# Altium PCB Mach_side_pcb.PcbDoc
Units mil, origin at the board's own origin, x right, y up, seen from the top; angles counter-clockwise.
Board outline 1370 x 1685 mil, 2 copper layers (Top Layer, Bottom Layer); 4 components, 8 nets, 24 pads, 4 vias.
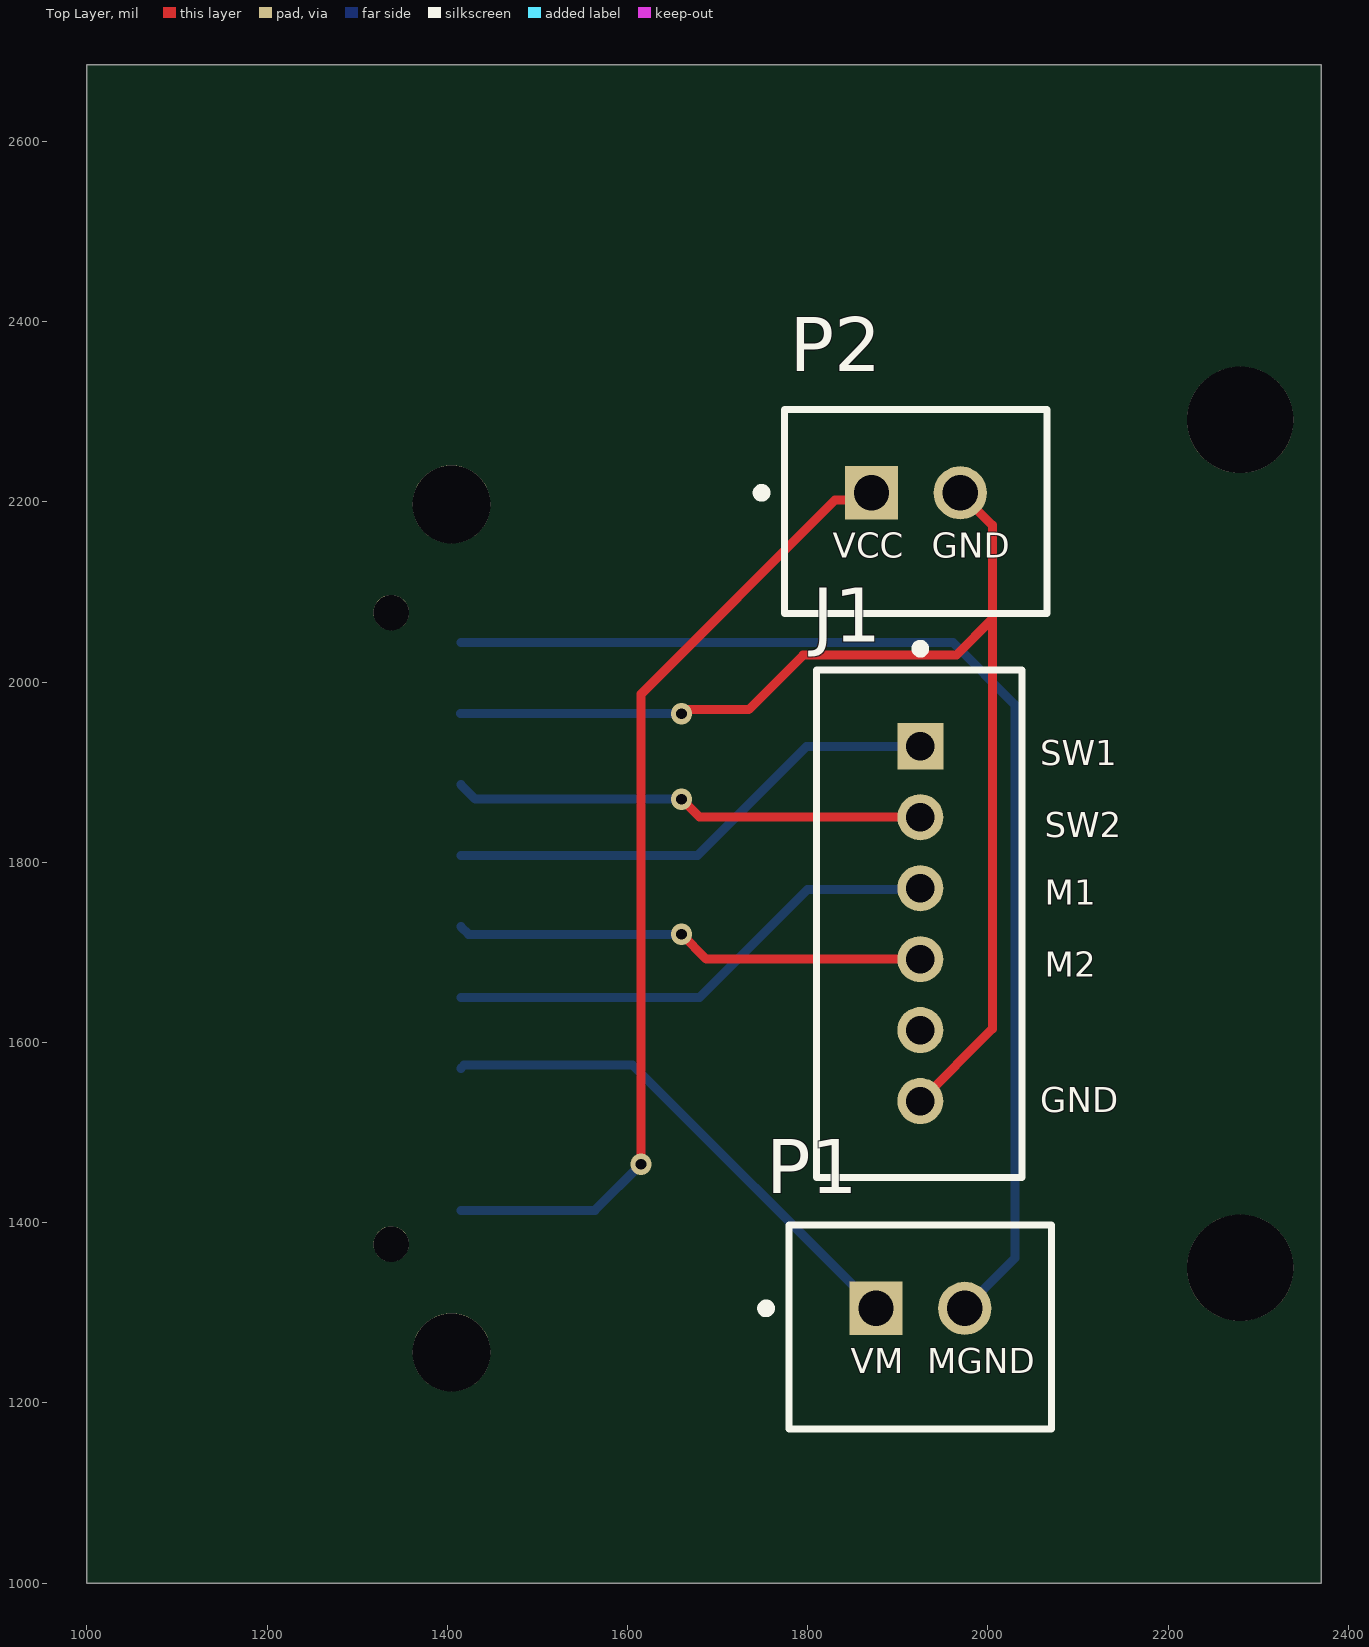
[diagram p0: Top Layer view]
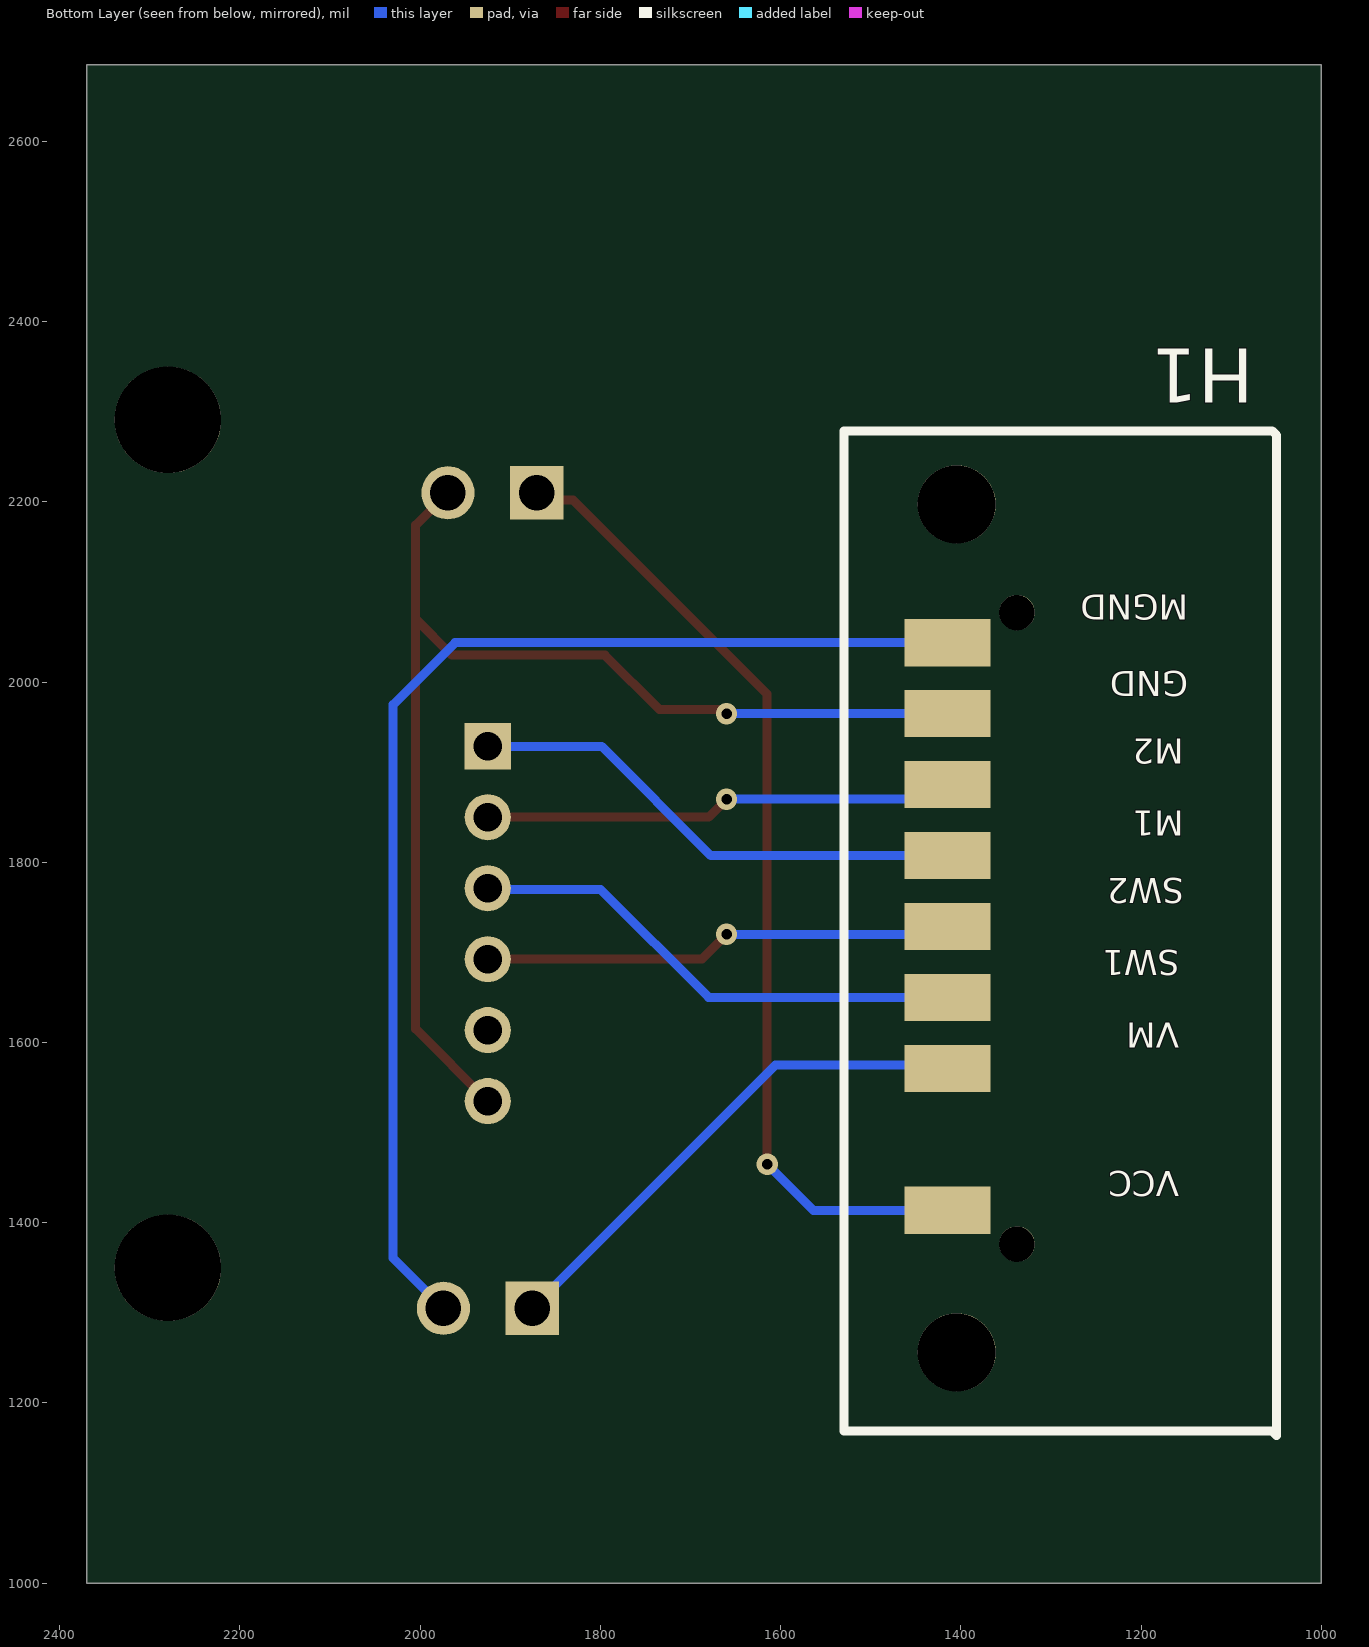
[diagram p1: Bottom Layer view, seen from below]
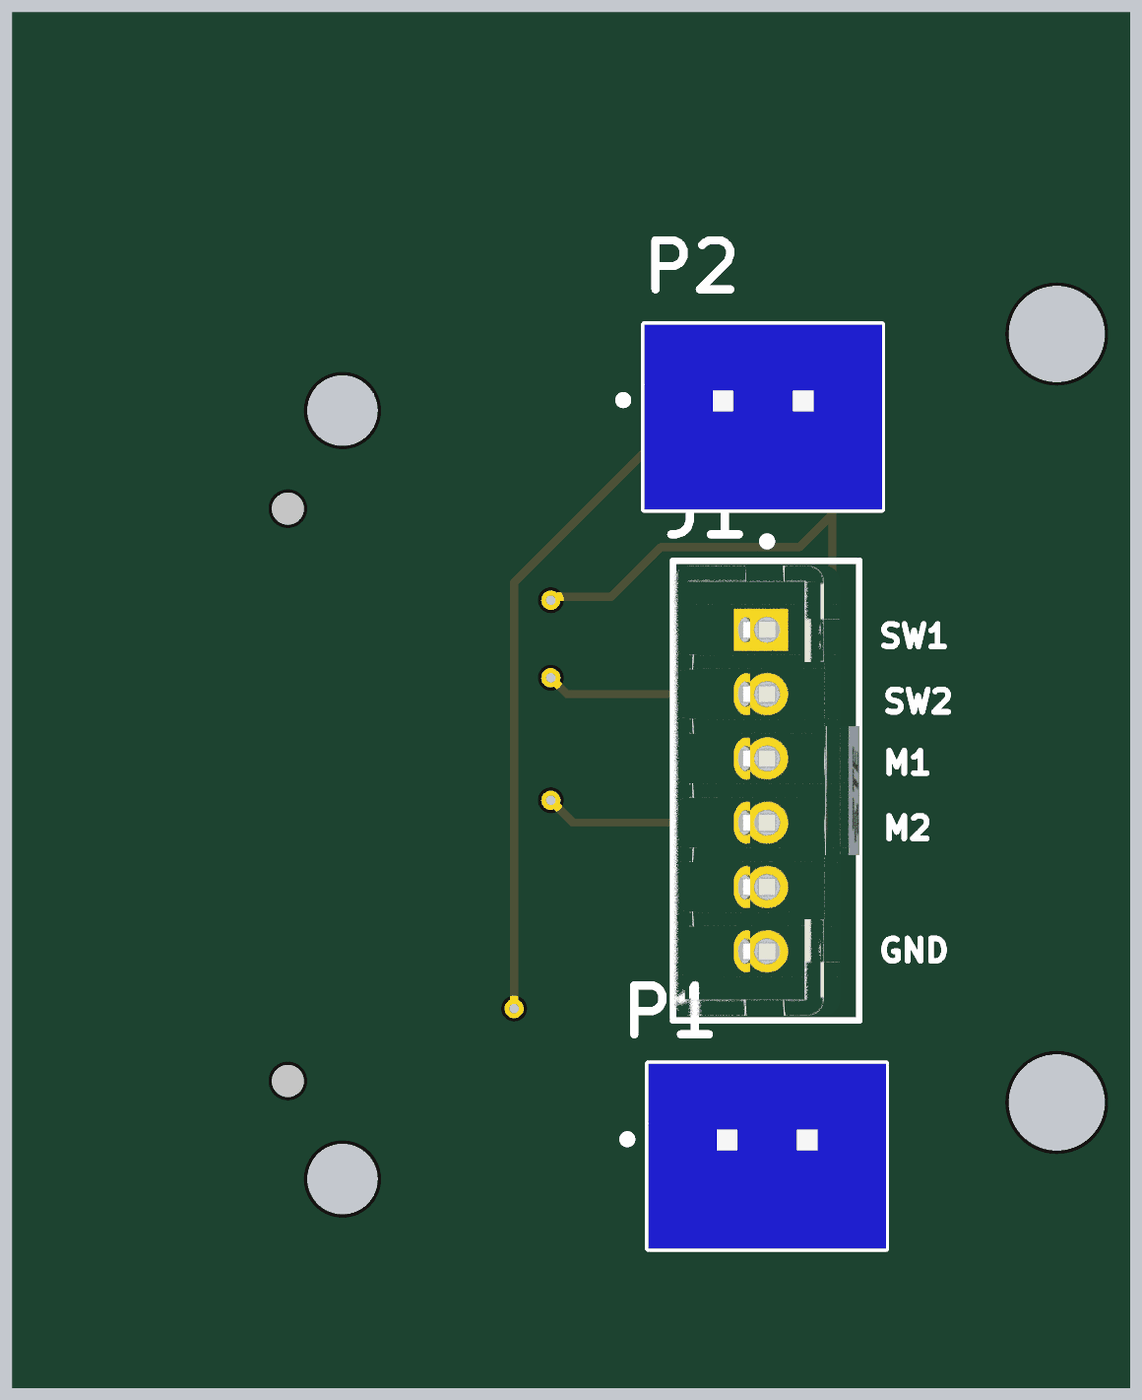
[diagram p2: 3D render of the assembled board from above, using the file's embedded part models]

## Layer stack, top to bottom
Top Solder: solder mask 0.4, Solder Resist, Dk 3.5
Top Layer: signal copper 1.4
Dielectric 1: dielectric 12.6, FR-4, Dk 4.8
Bottom Layer: signal copper 1.4
Bottom Solder: solder mask 0.4, Solder Resist, Dk 3.5

## Board outline
1000,1000 2370,1000 2370,2685 1000,2685

## Design rules (kind name [scope] priority, off if disabled: settings)
Clearance [All] p1: gap=10 ignorepadtopadclearanceinfootprint=FALSE except(0: Arc-Hole Track-Hole SMDPad-Hole THPad-Hole Via-Hole Fill-Hole Poly-Hole Region-Hole Text-Hole)
PolygonConnect [All] p1: connectstyle=Relief reliefconductorwidth=10 reliefentries=4 polygonreliefangle="90 Angle" airgapwidth=10
RoutingVias [All] p1: holewidth=28 width=50 viastyle="Through Hole" minholewidth=28 minwidth=50 maxholewidth=28 maxwidth=50
SolderMaskExpansion [All] p1: expansion=4 istentingtop=FALSE
Width [All] p1 off: maxlimit=10 minlimit=10 preferedwidth=10
30 further rules are at their usual default settings.

## Classes and differential pairs
component class Mach_side_sch: H1 J1 P1

## Components (designator, comment, footprint, x,y, rotation, side; value= is the part's Value field where it differs from the comment)
H1 "1747785-1" 1747785-1 1337.76,1376.32 r90 bottom
J1 "1735446-6" FP-1735446-6-MFG 1923.82,1731.89 r90 top
P1 "B2B-XH-A(LF)(SN)" JST-B2B-XH-A_V 1925,1305 r0 top
P2 "B2B-XH-A(LF)(SN)" JST-B2B-XH-A_V 1920,2210 r0 top

## Footprints (in the part's own frame and the unit in brackets; to place one, negate y for a bottom-side part, rotate by r counter-clockwise, add the part's x,y. Pads: shape width x height; smd on the part's side, far side on the other; paste and mask are expansions set on the pad)
1747785-1 [mm]
  rect 1.33x2.43 smd: 1(0.951,1.962) 2(4.952,1.962) 3(6.952,1.962) 4(8.952,1.962) 5(10.952,1.962) 6(12.951,1.962) 7(14.951,1.962) 8(16.951,1.962)
  round 2.2 hole 2.2 unplated: ""(-3.05,1.7) ""(20.85,1.7)
  round 1 hole 1 unplated: ""(0,0) ""(17.8,0)
  Top Layer lines w0.254: 20.826,1.7 20.838,1.712
  silkscreen extent -5.4,-7.32 22.92,4.88, body extent -5.1,-7.05 23,5, height 4.71
FP-1735446-6-MFG [mm]
  rect 1.3x1.3 hole 0.8 paste-1000 mask+0: 1(5,-0.03)
  round 1.3 hole 0.8 paste-1000 mask+0: 2(3,-0.03) 3(1,-0.03) 4(-1,-0.03) 5(-3,-0.03) 6(-5,-0.03)
  silkscreen extent -7.15,-2.9 7.87,2.9, body extent -7.25,-3 7.25,3, height 0.25
JST-B2B-XH-A_V [mm] "Header, 2-Leads, Body 7.4x5.75mm, Pitch 2.5mm"
  rect 1.5x1.5 hole 1: 1(-1.25,0)
  round 1.5 hole 1: 2(1.25,0)
  silkscreen extent -4.47,-3.4 3.7,2.35, body extent -3.7,-3.4 3.7,2.35, height 7

## Part data
J1: library part CMP-03369-000087-1, "CONN HEADER VERT 6POS 2MM", Current Rating=3A, Manufacturer=TE, Temperature="-25°C to +85°C", Temperature Range High=+85°C, Temperature Range Low=-25°C, Voltage Rating=100V, Automotive=No, Category=Conn, ComponentLink2Description=Datasheet, ComponentLink2URL=https://www.te.com/usa-en/product-1735446-6.html, Conn Gender=Male, Conn Orientation=Vertical, Contact Material=Tin,Nickel, Device Class L1=Connectors, Device Class L2="Headers and Wire Housings", Device Class L3=unset, Digikey Description="CONN HEADER VERT 6POS 2MM", Height=6.37mm, Lead Free=Yes, Manufacturer Part Number=1735446-6, Mouser Description="Headers & Wire Housings 6 POS HDR VERT 2.0mm", Number Of Contacts=6, Number of Rows=1, Octopart=https://octopart.com/1735446-6-te+connectivity-42205942, Package=1735446-6, Pitch=2mm, RoHS=TRUE
P1 P2: library part CMP-2000-05888-1, "Male Header, Pitch 2.5 mm, 1 x 2 Position, Height 7 mm, Tail Length 3.4 mm, -25 to 85 degC, RoHS, Bulk", Manufacturer=JST, Package Description="Male Header, Pitch 2.5 mm, 1 x 2 Position, Height 7 mm, Tail Length 3.4 mm", Package Reference=B2B-XH-A, Datasheet URL=http://www.jst-mfg.com/product/pdf/eng/eXH.pdf, Datasheet Version=05/2016, Manufacturer URL=http://www.jst.com/home2.html, Mounting Technology=ThroughHole, No of Positions=2, Pitch=2.5mm, Style/Orientation=StraightHeader/Plug, Termination=Crimp, Type=ShroudedHeader

## Free pads (board coordinates)
  round 118.11 hole 118.11 unplated: ""(2280,1350) ""(2280,2290.94)

## Via types
v1: diameter 23.62, hole 11.81, Top Layer to Bottom Layer, 4 vias

## Nets (pads, with @x,y where several pads share a name; then routed paths per layer and width w, separated by ;. In a path a pad name is that pad's centre, name@x,y a point inside that pad or via, vN(x,y) a via of type N, cw(c..) or ccw(c..) an arc to the next point about the centre after c; other vN are vias at no path point)
"CONN M1": H1.5 J1.1 | length 560.2
  Bottom Layer w10: H1.5 1677.48,1807.48 1798.74,1928.74 J1.1
"CONN M2": H1.6 J1.2 | length 525
  Top Layer w10: v1(1660,1870) 1680,1850 J1.2
  Bottom Layer w10: H1.6 1431.22,1870 v1(1660,1870)
"CONN SW1": H1.3 J1.3 | length 560.2
  Bottom Layer w10: H1.3 1680,1650 1800,1770 1923.74,1770 J1.3
"CONN SW2": H1.4 J1.4 | length 525
  Top Layer w10: v1(1660,1720) 1687.48,1692.52 J1.4
  Bottom Layer w10: H1.4 1423.74,1720 v1(1660,1720)
GND: H1.7 J1.6 P2.2 | length 1356.5
  Top Layer w10: v1(1660,1965) 1664.33,1969.33 1734.33,1969.33 1795,2030 1965,2030 2005,2070 ; J1.6 2005,1615.04 2005,2070 ; P2.2 2005,2174.21 2005,2070
  Bottom Layer w10: H1.7 H1.7 v1(1660,1965) v1(1660,1965)
MGND: H1.8 P1.2 | length 1336.6
  Bottom Layer w10: H1.8 1961.3,2043.7 2030,1975 2030,1360.79 P1.2
VCC: H1.1 P2.1 | length 1091.1
  Top Layer w10: v1(1615,1465) 1615,1986.57 1830.55,2202.12 1862.91,2202.12 P2.1
  Bottom Layer w10: H1.1 1563.78,1413.78 v1(1615,1465)
VM: H1.2 P1.1 | length 574.2
  Bottom Layer w10: H1.2 1418.74,1575 1605.79,1575 P1.1
pads on no net: H1. J1.5

## Silkscreen, mask and mechanical layers (free items; w line width, h text height)
Top Overlay:
  text "VCC" at 1827.87,2137.87 h27.56
  text "GND" at 1937.87,2137.87 h27.56
  text "SW1" at 2057.87,1907.87 h27.56
  text "SW2" at 2062.87,1827.87 h27.56
  text "M1" at 2062.87,1752.87 h27.56
  text "M2" at 2062.87,1672.87 h27.56
  text "GND" at 2057.87,1522.87 h27.56
  text "VM" at 1847.87,1232.87 h27.56
  text "MGND" at 1932.87,1232.87 h27.56
Bottom Overlay:
  text "MGND" at 1147.87,2097.13 h27.56 r180
  text "GND" at 1147.87,2012.13 h27.56 r180
  text "M2" at 1152.87,1937.13 h27.56 r180
  text "M1" at 1152.87,1857.13 h27.56 r180
  text "SW2" at 1152.87,1782.13 h27.56 r180
  text "SW1" at 1157.87,1702.13 h27.56 r180
  text "VM" at 1157.87,1622.13 h27.56 r180
  text "VCC" at 1157.87,1457.13 h27.56 r180